# EAGLE board AIRDCR (EAGLE 9.5.1)
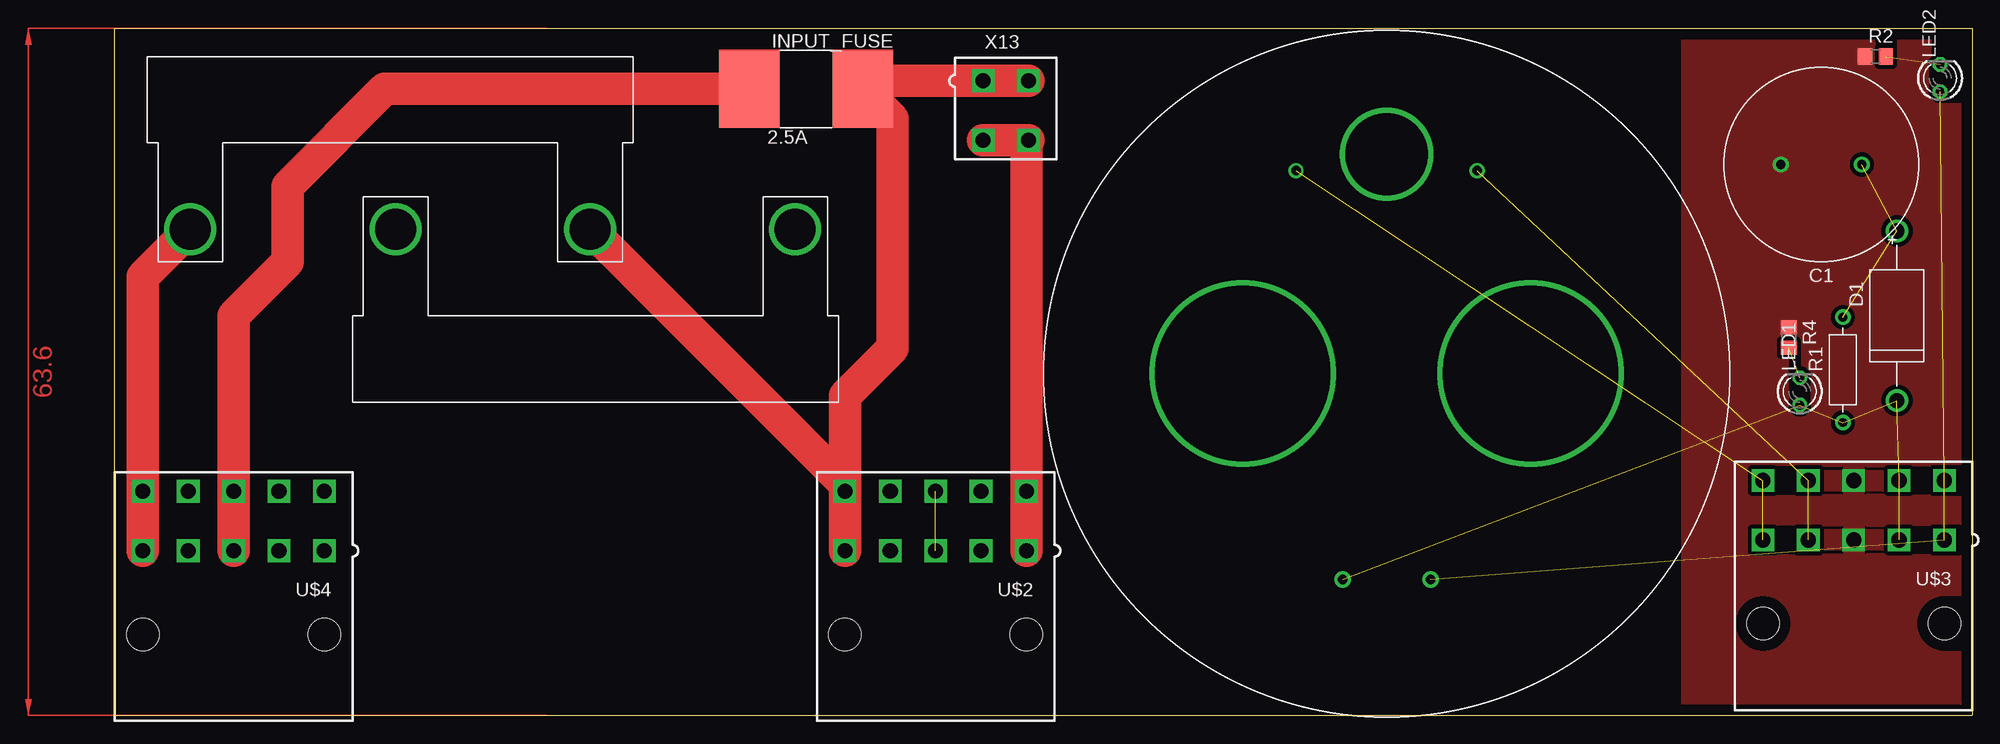
[diagram p0: board, top side]
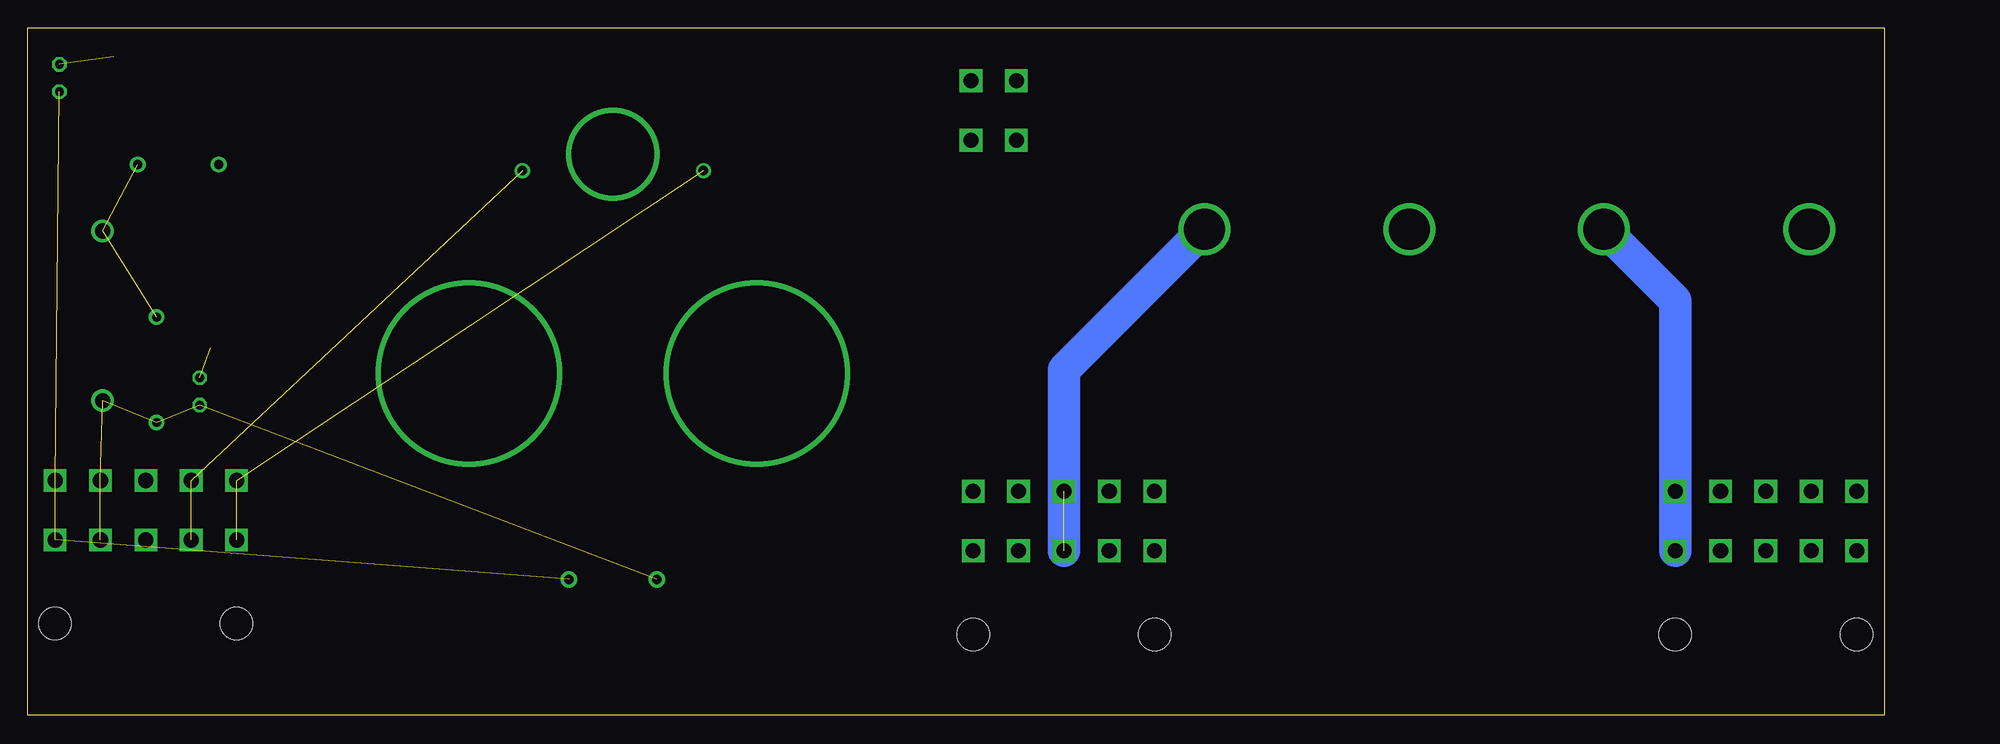
[diagram p1: board, bottom side, seen from below]

Size 172 x 63.6 mm. Coordinates in mm from the lower left corner, seen from the top.
Outline: 0,0 172,0 172,63.6 0,63.6 0,0
Copper layers (1*16): Top 0.035mm / dielectric 1.5mm / Bottom 0.035mm
Design rules "default": minimum track width 6mil, minimum drill 0.35mm, track to track 6mil, track to pad 6mil, pad to pad 6mil, via to via 6mil, smd to smd 6mil, copper to edge 40mil, drill to drill 6mil, minimum pad ring 10mil, minimum via ring 8mil, stop-mask expansion 4mil, vias tented up to drill 0mil, thermal gap 10mil
Net classes: 0 default: width 0.1 mm, clearance 0.4 mm; 1 LV: clearance 0.001 mm; 2 HV: clearance 2.5 mm

## Footprints (pad centres in the part's own frame; a part is rotated, then mirrored left to right if it is on the bottom)
CAPPRD750W65D1800H3700B = drill 0.85 pad 1.45: 1 -3.75,0; 2 3.75,0
DIOAD1570W120L850D500B = drill 1.4 pad 2.1: 1 -7.85,0; 2 7.85,0
_CUSTOM_PARTS_LF_885 = smd 5.6 x 7.23: P$1 5.25,0; P$2 -5.25,0
LED3MM = drill 0.813 octagon: A -1.27,0; K 1.27,0
RESAD976W63L650D250B = drill 0.83 pad 1.43: 1 -4.88,0; 2 4.88,0
R0805 = smd 1.3 x 1.5: 1 -0.95,0; 2 0.95,0
GV224 = drill 16.256: A1 -13.335,19.05; A2 13.335,19.05 | drill 7.62: NC1 0,39.37 | drill 0.889: T1 -8.382,37.846; T2 8.382,37.846 | drill 0.889 pad 1.524: X1 -4.064,0; X2 4.064,0
15-24-6100 = drill 1.4 square: 1 8.4,-2.75; 2 4.2,-2.75; 3 0,-2.75; 4 -4.2,-2.75; 5 -8.4,-2.75; 6 8.4,2.75; 7 4.2,2.75; 8 0,2.75; 9 -4.2,2.75; 10 -8.4,2.75 | hole 3: 8.4,-10.5; -8.4,-10.5
FVTS10 = drill 3.8: P$1 0,0; P$2 37,0
5566-4 = drill 1.4 square: 1 2.1,-2.75; 2 -2.1,-2.75; 3 2.1,2.75; 4 -2.1,2.75

## Placement (x,y rotation side)
C1  15000u  [CAPPRD750W65D1800H3700B]  158,51 180 top
D1  10A  [DIOAD1570W120L850D500B]  165,37 90 top
INPUT_FUSE  2.5A  [_CUSTOM_PARTS_LF_885]  64,58 0 top
LED1  [LED3MM]  156,30 90 top
LED2  [LED3MM]  169,59 90 top
R1  100  [RESAD976W63L650D250B]  160,32 90 top
R2  [R0805]  163,61 0 top
R4  [R0805]  155,35 270 top
U$1  GV224  [GV224]  117.75,12.59 0 top
U$2  15-24-6100  [15-24-6100]  76,18 0 top
U$3  15-24-6100  [15-24-6100]  161,19 0 top
U$4  15-24-6100  [15-24-6100]  11,18 0 top
U$5  FVTS10  [FVTS10]  26,45 0 top
U$6  FVTS10  [FVTS10]  44,45 180 top
X13  5566-4  [5566-4]  82.5,56 180 top

## Library data of the parts
C1 D1 R1 = Main
INPUT_FUSE LED1 LED2 U$1-U$6 = ACC-MB-R0
R2 R4 = ACC-MB-R0; SPICEPREFIX: R
X13 = ACC-MB-R0; MF: MOLEX; OC_FARNELL: unknown; OC_NEWARK: unknown

## Nets
AUX_T1: U$1.T1 U$3.5 U$3.10
AUX_T2: U$1.T2 U$3.4 U$3.9
COIL_X1: D1.1 LED1.A R1.1 U$1.X1 U$3.2 U$3.7
COIL_X2: LED2.A U$1.X2 U$3.1 U$3.6
GND: C1.2 R2.1 R4.1 U$3.3 U$3.8
HV+_DRY: INPUT_FUSE.P$1 U$2.5 U$2.10 U$6.P$1 X13.1 X13.2
HV+_WET [HV]: U$2.1 U$2.6 X13.3 X13.4
HV-_DRY: U$2.3 U$2.8 U$5.P$2
N$1: LED2.K R2.2
N$2: INPUT_FUSE.P$2 U$4.3 U$4.8
N$3: C1.1 D1.2 R1.2
N$5: LED1.K R4.2
N$10: U$4.5 U$4.10 U$6.P$2
N$17: U$4.1 U$4.6 U$5.P$1

## Tracks (layer width: path | path; a pad name or v marks a point on that pad's centre or on a via)
AUX_T1  (2 unrouted)
AUX_T2  (2 unrouted)
COIL_X1  (5 unrouted)
COIL_X2  (3 unrouted)
GND
  pour Top: 146,63.6 146,0 173,0 173,63.6
HV+_DRY
  Top 3: U$6.P$1 67.6,21.4 | 67.6,21.4 U$2.10 U$2.5 | X13.2 X13.1 70,58.75 INPUT_FUSE.P$1 72,55.25 72,34 67.6,29.6 67.6,21.4
HV+_WET
  Top 3: U$2.1 U$2.6 84.4,53.05 X13.4 X13.3
HV-_DRY  (1 unrouted)
  Bottom 3: U$5.P$2 76,32 U$2.3
N$1  (1 unrouted)
N$2
  Top 3: U$4.3 U$4.8 11,37 16,42 16,49 25,58 INPUT_FUSE.P$2
N$3  (2 unrouted)
N$5  (1 unrouted)
N$10
  Top 3: U$4.5 U$4.10 2.6,40.6 U$6.P$2
N$17
  Bottom 3: U$4.1 U$4.6 19.4,38.4 U$5.P$1
(copper drawn outside any net)
  shapes: Top area x1